# Altium PCB DMM6500 Scan card.PcbDoc (part 2 of 2)
Units mm, origin at the board's own origin, x right, y up, seen from the top; angles counter-clockwise.
Board outline 228.6 x 72.14 mm, 2 copper layers (Top Layer, Bottom Layer); 208 components, 132 nets, 652 pads, 172 vias.
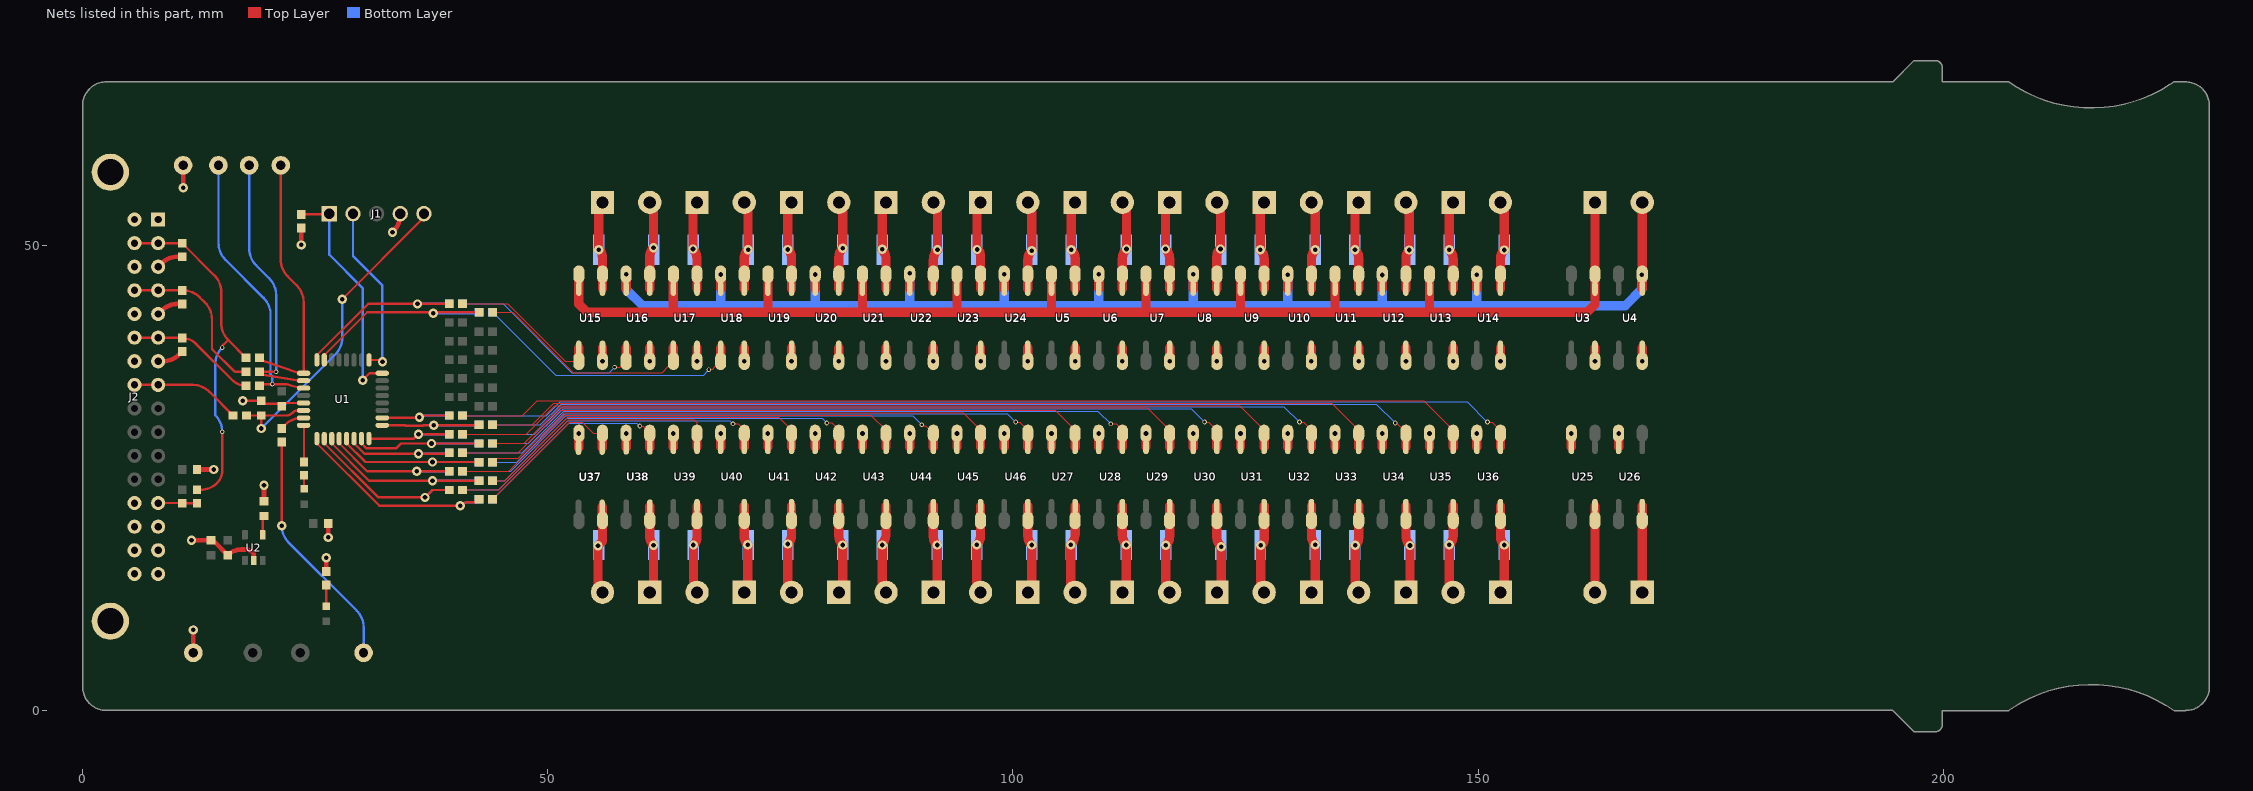
[diagram p2: the nets of this part, all layers, seen from the top]

## Via types
v1: diameter 1, hole 0.5, Top Layer to Bottom Layer, tented both sides, 146 vias
v2: diameter 0.5, hole 0.3, Top Layer to Bottom Layer, tented both sides, 26 vias

## Nets (pads, with @x,y where several pads share a name; then routed paths per layer and width w, separated by ;. In a path a pad name is that pad's centre, name@x,y a point inside that pad or via, vN(x,y) a via of type N, cw(c..) or ccw(c..) an arc to the next point about the centre after c; other vN are vias at no path point) (continued)
CH9_N: R18.2 U18.1 | length 29.5
  Top Layer w0.127: v2(67.3,36.635) 67.36,36.695 67.74,36.695 68.025,36.98 68.084,36.98 68.58,37.475 U18.1@68.58,37.535
  Top Layer w1: U18.1@68.58,37.535 U18.1@68.58,38.989
  Bottom Layer w0.127: R18.2@44.05,42.8 44.075,42.8 50.829,36.046 66.746,36.046 67.3,36.6 v2(67.3,36.635)
CH9_P: R17.2 U17.1 | length 24.1
  Top Layer w0.127: R17.2@44.075,42.8 46.241,42.8 52.719,36.322 62.287,36.322 62.945,36.98 63.004,36.98 63.5,37.475 U17.1@63.5,37.535
  Top Layer w1: U17.1@63.5,37.535 U17.1@63.5,38.989
CH9_uC: R17.1 R18.1 U1.31 | length 24.1
  Top Layer w0.254: U1.31@25.975,37.675 25.975,38.176 30.599,42.8 37.6,42.8 v1(37.7,42.7) 37.8,42.8 R17.1@42.625,42.8
  Bottom Layer w0.254: v1(37.7,42.7) 42.5,42.7 R18.1@42.6,42.8
CH10_N: R20.2 U16.1 | length 22.6
  Top Layer w0.127: v2(57.185,36.889) 57.774,36.889 57.865,36.98 57.924,36.98 58.42,37.475 U16.1@58.42,37.535
  Top Layer w1: U16.1@58.42,37.535 U16.1@58.42,38.989
  Bottom Layer w0.127: R20.2@40.85,43.7 45.2,43.7 52.6,36.3 56.596,36.3 v2(57.185,36.889)
CH10_P: R19.2 U15.1 | length 16.5
  Top Layer w0.127: R19.2@40.85,43.7 45.7,43.7 51.865,37.535 U15.1@53.34,37.535
  Top Layer w1: U15.1@53.34,37.535 U15.1@53.34,38.989
CH10_uC: R19.1 R20.1 U1.32 | length 19.9
  Top Layer w0.254: U1.32@25.175,38.176 30.699,43.7 v1(36,43.7) R19.1@39.4,43.7
  Bottom Layer w0.254: v1(36,43.7) R20.1@39.4,43.7
CH11_N: R22.2 U36.1 | length 115.2
  Top Layer w0.127: v2(151,31) 151.525,31 152.4,30.125 U36.1@152.4,29.775
  Top Layer w1: U36.1@152.4,28.321 U36.1@152.4,29.775
  Bottom Layer w0.127: R22.2@40.85,31.7 49.842,31.7 51.32,33.178 148.822,33.178 v2(151,31)
CH11_P: R21.2 U35.1 | length 110.2
  Top Layer w0.127: R21.2@40.85,31.7 47.279,31.7 48.853,33.275 54.645,33.275 144.171,33.274 147.32,30.125 U35.1@147.32,29.775
  Top Layer w1: U35.1@147.32,28.321 U35.1@147.32,29.775
CH11_uC: R21.1 R22.1 U1.18 | length 10
  Top Layer w0.254: U1.18@32.2,31.45 32.227,31.477 36.173,31.477 v1(36.2,31.504) ; 36.702,31.7 R21.1@39.4,31.7
  Bottom Layer w0.254: v1(36.2,31.504) 36.343,31.647 36.649,31.647 36.702,31.7 R22.1@39.4,31.7
CH12_N: R24.2 U34.1 | length 101.9
  Top Layer w0.127: v2(141.1,30.9) 141.201,30.9 142.24,29.861 U34.1@142.24,29.775
  Top Layer w1: U34.1@142.24,28.321 U34.1@142.24,29.775
  Bottom Layer w0.127: R24.2@44.05,30.7 49.201,30.7 51.425,32.924 139.076,32.924 v2(141.1,30.9)
CH12_P: R23.2 U33.1 | length 97.1
  Top Layer w0.127: R23.2@44.05,30.7 48.34,30.7 50.661,33.021 54.539,33.021 134.265,33.02 137.16,30.125 U33.1@137.16,29.775
  Top Layer w1: U33.1@137.16,28.321 U33.1@137.16,29.775
CH12_uC: R23.1 R24.1 U1.17 | length 15.3
  Top Layer w0.254: U1.17@32.2,30.65 34.676,30.65 34.703,30.623 36.593,30.623 36.62,30.65 v1(37.75,30.65) 42.55,30.65 R23.1@42.6,30.7
  Bottom Layer w0.254: v1(37.75,30.65) 42.55,30.65 R24.1@42.6,30.7
CH13_N: R26.2 U32.1 | length 95.3
  Top Layer w0.127: v2(130.8,31) 130.835,30.965 131.24,30.965 132.08,30.125 U32.1@132.08,29.775
  Top Layer w1: U32.1@132.08,28.321 U32.1@132.08,29.775
  Bottom Layer w0.127: R26.2@40.85,29.7 48.561,29.7 51.531,32.67 129.13,32.67 v2(130.8,31)
CH13_P: R25.2 U31.1 | length 90.3
  Top Layer w0.127: R25.2@40.85,29.7 47.699,29.7 50.766,32.767 54.434,32.767 124.359,32.766 127,30.125 U31.1@127,29.775
  Top Layer w1: U31.1@127,28.321 U31.1@127,29.775
CH13_uC: R25.1 R26.1 U1.16 | length 12.1
  Top Layer w0.254: U1.16@30.775,29.225 35.625,29.225 v1(36.1,29.7) R25.1@39.4,29.7
  Bottom Layer w0.254: v1(36.1,29.7) R26.1@39.4,29.7
CH14_N: R28.2 U30.1 | length 82.2
  Top Layer w0.127: v2(120.6,31) 121.045,31 121.92,30.125 U30.1@121.92,29.775
  Top Layer w1: U30.1@121.92,28.321 U30.1@121.92,29.775
  Bottom Layer w0.127: R28.2@44.05,28.7 47.92,28.7 51.636,32.416 119.184,32.416 v2(120.6,31)
CH14_P: R27.2 U29.1 | length 77.2
  Top Layer w0.127: R27.2@44.05,28.7 47.489,28.7 51.301,32.513 54.329,32.513 114.453,32.512 116.84,30.125 U29.1@116.84,29.775
  Top Layer w1: U29.1@116.84,28.321 U29.1@116.84,29.775
CH14_uC: R27.1 R28.1 U1.15 | length 18.7
  Top Layer w0.254: U1.15@29.975,29.225 29.975,28.724 30.526,28.173 33.699,28.173 34.226,28.7 v1(37.5,28.7) R27.1@42.6,28.7
  Bottom Layer w0.254: v1(37.5,28.7) R28.1@42.6,28.7
CH15_N: R30.2 U28.1 | length 75.4
  Top Layer w0.127: v2(110.5,30.8) 111.085,30.8 111.76,30.125 U28.1@111.76,29.775
  Top Layer w1: U28.1@111.76,28.321 U28.1@111.76,29.775
  Bottom Layer w0.127: R30.2@40.85,27.7 47.279,27.7 51.741,32.162 109.138,32.162 v2(110.5,30.8)
CH15_P: R29.2 U27.1 | length 70.4
  Top Layer w0.127: R29.2@40.85,27.7 46.848,27.7 51.407,32.259 54.224,32.259 104.547,32.258 106.68,30.125 U27.1@106.68,29.775
  Top Layer w1: U27.1@106.68,28.321 U27.1@106.68,29.775
CH15_uC: R29.1 R30.1 U1.14 | length 14.6
  Top Layer w0.254: U1.14@29.175,29.225 29.175,28.724 30.299,27.6 v1(36.1,27.6) 39.3,27.6 R29.1@39.4,27.7
  Bottom Layer w0.254: v1(36.1,27.6) 39.3,27.6 R30.1@39.4,27.7
CH16_N: R32.2 U46.1 | length 62.2
  Top Layer w0.127: v2(100.3,31) 100.315,30.985 100.74,30.985 101.6,30.125 U46.1@101.6,29.775
  Top Layer w1: U46.1@101.6,28.321 U46.1@101.6,29.775
  Bottom Layer w0.127: R32.2@44.05,26.7 46.638,26.7 51.846,31.908 99.392,31.908 v2(100.3,31)
CH16_P: R31.2 U45.1 | length 57.2
  Top Layer w0.127: R31.2@44.05,26.7 44.437,27.087 46.831,27.087 51.749,32.005 54.119,32.005 94.641,32.004 96.52,30.125 U45.1@96.52,29.775
  Top Layer w1: U45.1@96.52,28.321 U45.1@96.52,29.775
CH16_uC: R31.1 R32.1 U1.13 | length 20.6
  Top Layer w0.254: U1.13@28.375,29.225 28.375,28.724 30.399,26.7 v1(37.6,26.7) R31.1@42.6,26.7
  Bottom Layer w0.254: v1(37.6,26.7) R32.1@42.6,26.7
CH17_N: R34.2 U44.1 | length 55.3
  Top Layer w0.127: v2(90.2,30.7) 90.271,30.629 90.586,30.629 90.885,30.33 90.944,30.33 91.44,29.835 U44.1@91.44,29.775
  Top Layer w1: U44.1@91.44,28.321 U44.1@91.44,29.775
  Bottom Layer w0.127: R34.2@40.85,25.7 45.997,25.7 51.951,31.654 89.246,31.654 v2(90.2,30.7)
CH17_P: R33.2 U43.1 | length 50.5
  Top Layer w0.127: R33.2@40.85,25.7 45.804,25.7 51.854,31.751 54.013,31.751 84.735,31.75 86.36,30.125 U43.1@86.36,29.775
  Top Layer w1: U43.1@86.36,28.321 U43.1@86.36,29.775
CH17_uC: R33.1 R34.1 U1.12 | length 17.1
  Top Layer w0.254: U1.12@27.575,29.225 27.575,28.724 30.599,25.7 v1(35.9,25.7) R33.1@39.4,25.7
  Bottom Layer w0.254: v1(35.9,25.7) R34.1@39.4,25.7
CH18_N: R37.2 U42.1 | length 42.3
  Top Layer w0.127: v2(80,30.9) 80.505,30.9 81.28,30.125 U42.1@81.28,29.775
  Top Layer w1: U42.1@81.28,28.321 U42.1@81.28,29.775
  Bottom Layer w0.127: R37.2@44.05,24.7 45.357,24.7 52.057,31.4 79.5,31.4 v2(80,30.9)
CH18_P: R36.2 U41.1 | length 37.3
  Top Layer w0.127: R36.2@44.05,24.7 45.357,24.7 52.153,31.497 53.908,31.497 74.829,31.496 76.2,30.125 U41.1@76.2,29.775
  Top Layer w1: U41.1@76.2,28.321 U41.1@76.2,29.775
CH18_uC: R36.1 R37.1 U1.11 | length 23
  Top Layer w0.254: U1.11@26.775,29.225 26.775,28.724 30.799,24.7 v1(37.6,24.7) R36.1@42.6,24.7
  Bottom Layer w0.254: v1(37.6,24.7) R37.1@42.6,24.7
CH19_N: R39.2 U40.1 | length 35.6
  Top Layer w0.127: v2(69.9,30.8) 70.445,30.8 71.12,30.125 U40.1@71.12,29.775
  Top Layer w1: U40.1@71.12,28.321 U40.1@71.12,29.775
  Bottom Layer w0.127: R39.2@40.85,23.7 44.716,23.7 52.162,31.146 69.554,31.146 v2(69.9,30.8)
CH19_P: R38.2 U39.1 | length 31
  Top Layer w0.127: R38.2@40.85,23.7 44.716,23.7 52.258,31.243 53.803,31.243 65.713,31.242 66.04,30.915 U39.1@66.04,29.775
  Top Layer w1: U39.1@66.04,28.321 U39.1@66.04,29.775
CH19_uC: R38.1 R39.1 U1.10 | length 19.6
  Top Layer w0.254: U1.10@25.975,29.225 25.975,28.724 31.799,22.9 v1(36.8,22.9) 37.6,23.7 R38.1@39.4,23.7
  Bottom Layer w0.254: v1(36.8,22.9) 37.6,23.7 R39.1@39.4,23.7
CH20_N: R41.2 U38.1 | length 22.3
  Top Layer w0.127: v2(59.9,30.579) 59.95,30.529 60.266,30.529 60.96,29.835 U38.1@60.96,29.775
  Top Layer w1: U38.1@60.96,29.775 60.965,29.77 60.965,28.28 U38.1@60.97,28.275
  Bottom Layer w0.127: R41.2@44.05,22.7 44.075,22.7 52.267,30.892 59.587,30.892 v2(59.9,30.579)
CH20_P: R40.2 U37.1 | length 17.3
  Top Layer w0.127: R40.2@44.05,22.7 44.075,22.7 52.363,30.989 53.698,30.989 54.911,29.775 U37.1@55.88,29.775
  Top Layer w1: U37.1@55.84,28.25 55.86,28.27 55.86,29.755 U37.1@55.88,29.775
CH20_uC: R40.1 R41.1 U1.9 | length 22.8
  Top Layer w0.254: U1.9@25.175,28.724 31.899,22 v1(40.6,22) 40.802,22 41.179,22.377 42.277,22.377 R40.1@42.6,22.7
  Bottom Layer w0.254: v1(40.6,22) 40.802,22 41.179,22.377 42.277,22.377 R41.1@42.6,22.7
Clock: J2.A4 J2.B4 R49.1 R54.2 | length 17.9
  Top Layer w0.254: J2.B4@5.575,45.155 J2.A4@8.115,45.155 10.695,45.155 R54.2@10.7,45.15 10.798,45.15 cw(c10.798,42.61) 12.594,44.406 13.156,43.844 cw(c11.36,42.048) 13.9,42.048 13.9,38.952 ccw(c14.154,38.952) 13.974,38.772 16.272,36.474 ccw(c16.452,36.654) 16.452,36.4 R49.1@17.575,36.4
Clock_uC: R49.2 TP3.1 U1.2 | length 29.9
  Top Layer w0.254: v2(20.8,36.4) R49.2@19.025,36.4 19.373,36.077 23.3,35.45 U1.2@23.75,35.45
  Bottom Layer w0.254: TP3.1@17.9,58.6 17.9,49.652 ccw(c20.44,49.652) 18.644,47.856 20.056,46.444 cw(c18.26,44.648) 20.8,44.648 v2(20.8,36.4)
Data: J2.A2 J2.B2 R48.1 R52.2 R53.2 | length 38.6
  Top Layer w0.254: J2.B2@5.575,50.235 J2.A2@8.115,50.235 10.676,50.235 cw(c10.676,50.201) R53.2@10.7,50.225 14.156,46.769 cw(c12.36,44.973) 14.9,44.973 14.9,41.627 ccw(c17.44,41.627) 15.644,39.831 ; R52.2@12.3,23.725 12.673,23.725 ccw(c12.673,26.265) 14.469,24.469 ccw(c13.187,25.751) 15,25.751 v2(15,29.948) ; v2(15,39) cw(c15.452,39) 15.132,39.319 15.644,39.831 ; R48.1@17.575,37.9 15.644,39.831
  Bottom Layer w0.254: v2(15,29.948) ccw(c12.46,29.948) 14.256,31.744 14.256,37.204 cw(c16.796,37.204) v2(15,39)
Data_uC: R48.2 TP2.1 U1.1 | length 28.2
  Top Layer w0.254: R48.2@19.025,37.9 19.373,37.577 23.3,36.25 U1.1@23.75,36.25 23.75,43.898 ccw(c21.21,43.898) 23.006,45.694 22.044,46.656 cw(c23.84,48.452) 21.3,48.452 TP2.1@21.3,58.6
GND: C1.2 C2.1 C3.1 C4.1 C5.1 C6.1 C7.1 J1.4 J2.A1 J2.A3 J2.A5 J2.A7 J2.A14 J2.A15 J2.A16 J2.B1 J2.B3 J2.B5 J2.B7 J2.B13 J2.B14 J2.B15 J2.B16 J2.MP1 J2.MP2 R35.1 R53.1 R54.1 R55.1 R57.1 TP7.1 TP8.1 U1.5 U2.2 U3.2 U4.2 U5.2 U6.2 U7.2 U8.2 U9.2 U10.2 U11.2 U12.2 U13.2 U14.2 U15.2 U16.2 U17.2 U18.2 U19.2 U20.2 U21.2 U22.2 U23.2 U24.2 U25.2 U26.2 U27.2 U28.2 U29.2 U30.2 U31.2 U32.2 U33.2 U34.2 U35.2 U36.2 U37.2 U38.2 U39.2 U40.2 U41.2 U42.2 U43.2 U44.2 U45.2 U46.2 | length 104.1
  Top Layer w0.254: v1(17.2,33.3) C2.1@19.2,33.3 19.548,32.977 21.052,32.977 C1.2@21.4,32.7 21.748,33.023 23.3,33.05 U1.5@23.75,33.05
  Top Layer w0.5: J2.A7@8.115,37.535 8.608,37.535 ccw(c8.608,40.075) 10.404,38.279 R55.1@10.7,38.575 ; J2.A5@8.115,42.615 8.456,42.956 cw(c10.252,41.16) 10.252,43.7 R54.1@10.7,43.7 ; J2.A3@8.115,47.695 8.451,48.031 cw(c10.247,46.235) 10.247,48.775 R53.1@10.7,48.775 ; v1(10.8,56.2) TP7.1@10.8,58.6 ; v1(11.7,18.3) C3.1@13.8,18.3 cw(c13.8,17.817) 14.141,18.159 C5.1@15.6,16.7 cw(c17.049,15.251) 17.049,17.3 17.434,17.3 cw(c17.434,15.934) 18.4,16.9 U2.2@18.4,16.125 ; TP8.1@11.9,6.2 v1(11.9,8.659) ; C4.1@12.3,25.9 v1(14.1,25.9) ; C7.1@19.5,22.5 v1(19.5,24.2) ; v1(23.5,50.041) R35.1@23.5,51.875 ; R57.1@26.2,14.925 v1(26.2,16.4) ; v1(26.4,18.6) C6.1@26.4,20.1 ; v1(33.3,51.4) 33.396,51.496 ccw(c31.6,53.292) 34.14,53.292 J1.4@34.14,53.4
  Top Layer w1: U37.2@53.3,28.25 53.32,28.27 U37.2@53.32,29.755 ; v1(55.88,37.535) U15.2@55.88,38.989 ; U38.2@58.425,29.77 58.425,28.28 U38.2@58.43,28.275 ; v1(60.96,37.535) U16.2@60.96,38.989 ; U39.2@63.5,28.321 v1(63.5,29.775) ; v1(66.04,37.535) U17.2@66.04,38.989 ; U40.2@68.58,28.321 v1(68.58,29.775) ; v1(71.12,37.535) U18.2@71.12,38.989 ; U41.2@73.66,28.321 v1(73.66,29.775) ; v1(76.2,37.535) U19.2@76.2,38.989 ; U42.2@78.74,28.321 v1(78.74,29.775) ; v1(81.28,37.535) U20.2@81.28,38.989 ; U43.2@83.82,28.321 v1(83.82,29.775) ; v1(86.36,37.535) U21.2@86.36,38.989 ; U44.2@88.9,28.321 v1(88.9,29.775) ; v1(91.44,37.535) U22.2@91.44,38.989 ; U45.2@93.98,28.321 v1(93.98,29.775) ; v1(96.52,37.535) U23.2@96.52,38.989 ; U46.2@99.06,28.321 v1(99.06,29.775) ; v1(101.6,37.535) U24.2@101.6,38.989 ; U27.2@104.14,28.321 v1(104.14,29.775) ; v1(106.68,37.535) U5.2@106.68,38.989 ; U28.2@109.22,28.321 v1(109.22,29.775) ; v1(111.76,37.535) U6.2@111.76,38.989 ; U29.2@114.3,28.321 v1(114.3,29.775) ; v1(116.84,37.535) U7.2@116.84,38.989 ; U30.2@119.38,28.321 v1(119.38,29.775) ; v1(121.92,37.535) U8.2@121.92,38.989 ; U31.2@124.46,28.321 v1(124.46,29.775) ; v1(127,37.535) U9.2@127,38.989 ; U32.2@129.54,28.321 v1(129.54,29.775) ; v1(132.08,37.535) U10.2@132.08,38.989 ; U33.2@134.62,28.321 v1(134.62,29.775) ; v1(137.16,37.535) U11.2@137.16,38.989 ; U34.2@139.7,28.321 v1(139.7,29.775) ; v1(142.24,37.535) U12.2@142.24,38.989 ; U35.2@144.78,28.321 v1(144.78,29.775) ; v1(147.32,37.535) U13.2@147.32,38.989 ; U36.2@149.86,28.321 v1(149.86,29.775) ; v1(152.4,37.535) U14.2@152.4,38.989 ; U25.2@160.02,28.321 v1(160.02,29.775) ; v1(162.56,37.535) U3.2@162.56,38.989 ; U26.2@165.1,28.321 v1(165.1,29.775) ; v1(167.64,37.535) U4.2@167.64,38.989
  Bottom Layer w0.5: v1(11.9,8.659) cw(c12.241,8.659) v1@12,8.9 ; v1(23.5,50.041) ccw(c23.841,50.041) v1@23.6,49.8
  other v1: 53.34,29.775 58.42,29.775
ID: J2.A13 R52.1 R56.2 | length 4.2
  Top Layer w0.254: J2.A13@8.115,22.295 10.652,22.295 cw(c10.652,22.227) R56.2@10.7,22.275 R52.1@12.3,22.275
In_Hi: J3.1 U3.3 U5.4 U7.4 U9.4 U11.4 U13.4 U15.4 U17.4 U19.4 U21.4 U23.4 | length 160.9
  Top Layer w1: U15.4@53.34,46.885 53.34,43.688 54.217,42.811 63.5,42.811 ; U17.4@63.5,46.885 63.5,42.811 ; U19.4@73.66,46.885 73.66,42.851 73.7,42.811 ; U21.4@83.82,46.885 83.82,42.831 83.8,42.811 ; U23.4@93.98,46.885 93.98,42.831 94,42.811 ; U5.4@104.14,46.885 104.14,42.871 104.2,42.811 ; U7.4@114.3,46.885 114.3,42.911 114.2,42.811 ; U9.4@124.46,46.885 124.46,42.951 124.6,42.811 ; U11.4@134.62,46.885 134.62,42.891 134.7,42.811 ; U13.4@144.78,46.885 144.78,42.831 144.8,42.811 ; J3.1@162.56,54.61 162.56,43.671 161.7,42.811 144.8,42.811 ; 63.5,42.811 73.7,42.811 ; 73.7,42.811 83.8,42.811 ; 83.8,42.811 94,42.811 ; 94,42.811 104.2,42.811 ; 104.2,42.811 114.2,42.811 ; 114.2,42.811 124.6,42.811 ; 124.6,42.811 134.7,42.811 ; 134.7,42.811 144.8,42.811
In_Lo: J3.2 U4.3 U6.4 U8.4 U10.4 U12.4 U14.4 U16.4 U18.4 U20.4 U22.4 U24.4 | length 169.4
  Top Layer w1: U16.4@58.42,45.339 58.42,46.88 v1(58.415,46.885) U16.4@58.42,46.885 ; U18.4@68.58,45.339 68.58,46.845 v1(68.6,46.865) U18.4@68.58,46.885 ; U20.4@78.74,45.339 v1(78.74,46.86) U20.4@78.74,46.885 ; U22.4@88.9,45.339 U22.4@88.9,46.885 ; U24.4@99.06,45.339 v1(99.06,46.885) ; U6.4@109.22,45.339 v1(109.22,46.885) ; U8.4@119.38,45.339 v1(119.38,46.885) ; U10.4@129.54,45.339 v1(129.54,46.84) U10.4@129.54,46.885 ; U12.4@139.7,45.339 v1(139.7,46.8) U12.4@139.7,46.885 ; U14.4@149.86,45.339 v1(149.86,46.84) U14.4@149.86,46.885 ; U4.3@167.64,45.339 167.64,46.805 v1(167.6,46.845) U4.3@167.64,46.885 J3.2@167.64,54.61 ; U22.4@88.9,46.885 v1(88.9,47) U22.4@88.9,46.885
  Bottom Layer w1: v1(58.415,46.885) 58.415,45.285 60.2,43.5 68.6,43.5 ; v1(68.6,46.865) 68.6,43.5 ; v1(78.74,46.86) 78.74,43.56 78.8,43.5 ; v1(88.9,47) 88.9,43.5 ; v1(99.06,46.885) 99.06,43.54 99.1,43.5 ; v1(109.22,46.885) 109.22,43.58 109.3,43.5 ; v1(119.38,46.885) 119.38,43.52 119.4,43.5 ; v1(129.54,46.84) 129.54,43.54 129.5,43.5 ; v1(139.7,46.8) 139.7,43.6 139.8,43.5 ; v1(149.86,46.84) 149.86,43.54 149.9,43.5 ; v1(167.6,46.845) 167.6,45.3 165.8,43.5 149.9,43.5 ; 68.6,43.5 78.8,43.5 ; 78.8,43.5 88.9,43.5 ; 88.9,43.5 99.1,43.5 ; 99.1,43.5 109.3,43.5 ; 109.3,43.5 119.4,43.5 ; 119.4,43.5 129.5,43.5 ; 129.5,43.5 139.8,43.5 ; 139.8,43.5 149.9,43.5
LED: D1.1 R47.2 | length 1.5
  Top Layer w0.254: D1.1@23.8,23.825 R47.2@23.8,25.275
LED_uC: R47.1 U1.8 | length 3.9
  Top Layer w0.254: U1.8@23.75,30.65 cw(c23.629,30.529) 23.8,30.529 R47.1@23.8,26.725
NetC7_2: C7.2 U2.4 | length 2.1
  Top Layer w0.254: U2.4@19.35,18.875 19.35,20.538 cw(c19.862,20.538) C7.2@19.5,20.9
NetD2_1: D2.1 R57.2 | length 2.2
  Top Layer w0.254: D2.1@26.2,11.225 R57.2@26.2,13.475
NetJ4_1: J4.1 R58.1 U5.3 | length 9.5
  Top Layer w1: U5.3@106.68,45.339 U5.3@106.68,46.885 106.68,48.583 ccw(c105.383,48.583) 106.3,49.5 v1(106.27,49.53) 106.27,53.62 cw(c107.67,53.62) J4.1@106.68,54.61
NetJ4_2: J4.2 R58.2 U6.3 | length 9.5
  Top Layer w1: U6.3@111.76,45.339 U6.3@111.76,46.885 111.76,48.538 cw(c113.262,48.538) v1(112.2,49.6) 112.2,53.548 ccw(c110.698,53.548) J4.2@111.76,54.61
NetJ5_1: J5.1 R59.1 U7.3 | length 9.5
  Top Layer w1: U7.3@116.84,45.339 U7.3@116.84,46.885 116.84,48.538 ccw(c115.338,48.538) v1(116.402,49.598) 116.402,53.552 cw(c117.898,53.552) J5.1@116.84,54.61
NetJ5_2: J5.2 R59.2 U8.3 | length 9.6
  Top Layer w1: U8.3@121.92,45.339 U8.3@121.92,46.885 121.92,48.783 cw(c123.217,48.783) v1@122.3,49.7 ; J5.2@121.92,54.61 cw(c121.003,53.693) 122.3,53.693 v1@122.3,49.7 ; v1(122.3,49.602) v1@122.3,49.7
NetJ6_1: J6.1 R60.1 U9.3 | length 9.5
  Top Layer w1: U9.3@127,45.339 U9.3@127,46.885 127,48.534 ccw(c125.634,48.534) 126.6,49.5 cw(c126.624,49.524) v1(126.59,49.524) 126.59,53.62 cw(c127.99,53.62) J6.1@127,54.61
NetJ6_2: J6.2 R60.2 U10.3 | length 9.5
  Top Layer w1: U10.3@132.08,45.339 U10.3@132.08,46.885 132.08,48.486 cw(c133.514,48.486) 132.5,49.5 v1(132.5,49.506) 132.5,53.596 ccw(c131.066,53.596) J6.2@132.08,54.61
NetJ7_1: J7.1 R61.1 U11.3 | length 9.5
  Top Layer w1: U11.3@137.16,45.339 U11.3@137.16,46.885 137.16,48.631 ccw(c135.931,48.631) 136.8,49.5 cw(c136.8,49.548) v1(136.766,49.514) 136.766,53.659 cw(c138.111,53.659) J7.1@137.16,54.61
NetJ7_2: J7.2 R61.2 U12.3 | length 9.5
  Top Layer w1: U12.3@142.24,45.339 U12.3@142.24,46.885 142.24,48.631 cw(c143.469,48.631) v1(142.6,49.5) 142.6,53.741 ccw(c141.371,53.741) J7.2@142.24,54.61
NetJ8_1: J8.1 R62.1 U13.3 | length 9.5
  Top Layer w1: U13.3@147.32,45.339 U13.3@147.32,46.885 147.32,48.486 ccw(c145.886,48.486) 146.9,49.5 v1(146.9,49.506) 146.9,53.596 cw(c148.334,53.596) J8.1@147.32,54.61
NetJ8_2: J8.2 R62.2 U14.3 | length 9.5
  Top Layer w1: U14.3@152.4,45.339 U14.3@152.4,46.885 152.4,48.534 cw(c153.766,48.534) v1(152.8,49.5) 152.8,53.644 ccw(c151.434,53.644) J8.2@152.4,54.61
NetJ9_1: J9.1 R63.1 U15.3 | length 9.6
  Top Layer w1: U15.3@55.88,45.339 U15.3@55.88,46.885 55.88,48.683 ccw(c54.583,48.683) 55.5,49.6 cw(c55.403,49.6) v1(55.472,49.532) 55.472,53.624 cw(c56.866,53.624) J9.1@55.88,54.61
NetJ9_2: J9.2 R63.2 U16.3 | length 9.5
  Top Layer w1: U16.3@60.96,45.339 U16.3@60.96,46.885 60.96,48.738 cw(c62.462,48.738) v1@61.37,49.769 ; J9.2@60.96,54.61 cw(c59.97,53.62) 61.37,53.62 v1@61.37,49.769 ; v1(61.37,49.728) v1@61.37,49.769
NetJ10_1: J10.1 R64.1 U17.3 | length 9.5
  Top Layer w1: U17.3@66.04,45.339 U17.3@66.04,46.885 66.04,48.538 ccw(c64.538,48.538) v1(65.602,49.598) 65.602,53.552 cw(c67.098,53.552) J10.1@66.04,54.61
NetJ10_2: J10.2 R64.2 U18.3 | length 9.6
  Top Layer w1: U18.3@71.12,45.339 U18.3@71.12,46.885 71.12,48.541 cw(c72.759,48.541) v1@71.53,49.625 ; J10.2@71.12,54.61 cw(c70.13,53.62) 71.53,53.62 v1@71.53,49.625 ; v1(71.53,49.531) v1@71.53,49.625
NetJ11_1: J11.1 R65.1 U19.3 | length 9.5
  Top Layer w1: v1(75.8,49.554) v1@75.8,49.6 ; U19.3@76.2,45.339 U19.3@76.2,46.885 76.2,48.634 ccw(c74.834,48.634) v1@75.8,49.6 ; J11.1@76.2,54.61 ccw(c77.166,53.644) 75.8,53.644 v1@75.8,49.6
NetJ11_2: J11.2 R65.2 U20.3 | length 9.5
  Top Layer w1: U20.3@81.28,45.339 U20.3@81.28,46.885 81.28,48.686 cw(c82.714,48.686) v1@81.69,49.69 ; J11.2@81.28,54.61 cw(c80.29,53.62) 81.69,53.62 v1@81.69,49.69 ; v1(81.69,49.676) v1@81.69,49.69
NetJ12_1: J12.1 R66.1 U21.3 | length 9.6
  Top Layer w1: U21.3@86.36,45.339 U21.3@86.36,46.885 86.36,48.489 ccw(c84.789,48.489) v1@85.902,49.598 ; J12.1@86.36,54.61 ccw(c87.384,53.586) 85.936,53.586 v1(85.936,49.564) v1@85.902,49.598 ; v1@85.902,49.598 ccw(c84.789,48.489) 85.9,49.6 v1@85.902,49.598
NetJ12_2: J12.2 R66.2 U22.3 | length 9.5
  Top Layer w1: U22.3@91.44,45.339 U22.3@91.44,46.885 91.44,48.39 cw(c93.01,48.39) 91.9,49.5 v1(91.884,49.516) 91.884,53.538 ccw(c90.368,53.538) J12.2@91.44,54.61
NetJ13_1: J13.1 R67.1 U23.3 | length 9.6
  Top Layer w1: U23.3@96.52,45.339 U23.3@96.52,46.885 96.52,48.827 ccw(c95.427,48.827) 96.2,49.6 v1(96.144,49.544) 96.144,53.703 cw(c97.427,53.703) J13.1@96.52,54.61
NetJ13_2: J13.2 R67.2 U24.3 | length 9.5
  Top Layer w1: U24.3@101.6,45.339 U24.3@101.6,46.885 101.6,48.434 cw(c102.966,48.434) 102,49.4 ccw(c101.976,49.424) v1(102.01,49.424) 102.01,53.62 ccw(c100.61,53.62) J13.2@101.6,54.61
NetJ15_1: J15.1 R68.2 U28.4 | length 9.5
  Top Layer w1: J15.1@111.76,12.7 ccw(c110.746,13.714) 112.18,13.714 v1(112.18,17.78) 112.2,17.8 cw(c113.262,18.862) 111.76,18.862 U28.4@111.76,20.425 U28.4@111.76,21.971
NetJ15_2: J15.2 R68.1 U27.4 | length 9.5
  Top Layer w1: J15.2@106.68,12.7 cw(c107.839,13.859) 106.2,13.859 v1(106.2,17.8) ccw(c105.041,18.959) 106.68,18.959 U27.4@106.68,20.425 U27.4@106.68,21.971
NetJ16_1: J16.1 R69.2 U30.4 | length 9.5
  Top Layer w1: J16.1@121.92,12.7 ccw(c120.761,13.859) 122.4,13.859 v1(122.4,17.6) 122.3,17.7 cw(c123.217,18.617) 121.92,18.617 U30.4@121.92,20.425 U30.4@121.92,21.971
NetJ16_2: J16.2 R69.1 U29.4 | length 9.5
  Top Layer w1: v1(116.43,17.772) v1@116.43,17.731 ; J16.2@116.84,12.7 cw(c117.83,13.69) 116.43,13.69 v1@116.43,17.731 ; U29.4@116.84,21.971 U29.4@116.84,20.425 116.84,18.762 cw(c115.338,18.762) v1@116.43,17.731
NetJ17_1: J17.1 R70.2 U32.4 | length 9.5
  Top Layer w1: J17.1@132.08,12.7 ccw(c131.066,13.714) 132.5,13.714 v1(132.5,17.8) cw(c133.514,18.814) 132.08,18.814 U32.4@132.08,20.425 U32.4@132.08,21.971
NetJ17_2: J17.2 R70.1 U31.4 | length 9.6
  Top Layer w1: J17.2@127,12.7 cw(c127.866,13.566) 126.641,13.566 v1(126.641,17.759) 126.7,17.7 ccw(c125.976,18.424) 127,18.424 U31.4@127,20.425 U31.4@127,21.971
NetJ18_1: J18.1 R71.2 U34.4 | length 9.6
  Top Layer w1: J18.1@142.24,12.7 ccw(c141.199,13.741) 142.671,13.741 v1(142.671,17.729) 142.7,17.7 cw(c143.81,18.81) 142.24,18.81 U34.4@142.24,20.425 U34.4@142.24,21.971
NetJ18_2: J18.2 R71.1 U33.4 | length 9.6
  Top Layer w1: J18.2@137.16,12.7 cw(c138.08,13.62) 136.779,13.62 v1(136.779,17.751) cw(c136.727,17.7) 136.8,17.7 ccw(c135.931,18.569) 137.16,18.569 U33.4@137.16,20.425 U33.4@137.16,21.971
NetJ19_1: J19.1 R72.2 U36.4 | length 9.5
  Top Layer w1: J19.1@152.4,12.7 ccw(c151.41,13.69) 152.81,13.69 v1(152.81,17.79) 152.8,17.8 cw(c153.766,18.766) 152.4,18.766 U36.4@152.4,20.425 U36.4@152.4,21.971
NetJ19_2: J19.2 R72.1 U35.4 | length 9.5
  Top Layer w1: J19.2@147.32,12.7 cw(c148.334,13.714) 146.9,13.714 v1(146.9,17.8) ccw(c145.886,18.814) 147.32,18.814 U35.4@147.32,20.425 U35.4@147.32,21.971
NetJ20_1: J20.1 R73.2 U38.4 | length 9.5
  Top Layer w1: J20.1@60.96,12.7 ccw(c59.97,13.69) 61.37,13.69 v1@61.37,17.731 ; U38.4@60.97,21.925 60.965,21.92 60.965,20.43 U38.4@60.96,20.425 60.96,18.762 ccw(c62.462,18.762) v1@61.37,17.731 ; v1(61.37,17.772) v1@61.37,17.731
NetJ20_2: J20.2 R73.1 U37.4 | length 9.5
  Top Layer w1: U37.4@55.84,21.9 55.86,21.88 55.86,20.445 U37.4@55.88,20.425 55.88,18.18 v1(55.4,17.7) 55.4,13.859 ccw(c57.039,13.859) J20.2@55.88,12.7
NetJ21_1: J21.1 R74.2 U40.4 | length 9.5
  Top Layer w1: J21.1@71.12,12.7 ccw(c70.203,13.617) 71.5,13.617 v1(71.5,17.8) cw(c72.417,18.717) 71.12,18.717 U40.4@71.12,20.425 U40.4@71.12,21.971
NetJ21_2: J21.2 R74.1 U39.4 | length 9.5
  Top Layer w1: J21.2@66.04,12.7 cw(c66.977,13.637) 65.652,13.637 v1(65.652,17.78) ccw(c65.652,17.848) 65.7,17.8 ccw(c64.879,18.621) 66.04,18.621 U39.4@66.04,20.425 U39.4@66.04,21.971
NetJ22_1: J22.1 R75.2 U42.4 | length 9.5
  Top Layer w1: J22.1@81.28,12.7 ccw(c80.266,13.714) 81.7,13.714 v1(81.7,17.79) 81.7,17.8 cw(c82.714,18.814) 81.28,18.814 U42.4@81.28,20.425 U42.4@81.28,21.971
NetJ22_2: J22.2 R75.1 U41.4 | length 9.5
  Top Layer w1: J22.2@76.2,12.7 cw(c77.166,13.666) 75.8,13.666 v1(75.8,17.9) ccw(c74.834,18.866) 76.2,18.866 U41.4@76.2,20.425 U41.4@76.2,21.971
NetJ23_1: J23.1 R76.2 U44.4 | length 9.5
  Top Layer w1: J23.1@91.44,12.7 ccw(c90.455,13.685) 91.848,13.685 v1(91.848,17.78) cw(c91.848,17.848) 91.8,17.8 cw(c92.669,18.669) 91.44,18.669 U44.4@91.44,20.425 U44.4@91.44,21.971
NetJ23_2: J23.2 R76.1 U43.4 | length 9.5
  Top Layer w1: J23.2@86.36,12.7 cw(c87.351,13.691) 85.949,13.691 v1(85.949,17.781) cw(c86.069,17.9) 85.9,17.9 ccw(c84.789,19.011) 86.36,19.011 U43.4@86.36,20.425 U43.4@86.36,21.971
NetJ24_1: J24.1 R77.2 U46.4 | length 9.5
  Top Layer w1: J24.1@101.6,12.7 ccw(c100.61,13.69) 102.01,13.69 v1(102.01,17.79) 102,17.8 cw(c102.966,18.766) 101.6,18.766 U46.4@101.6,20.425 U46.4@101.6,21.971
NetJ24_2: J24.2 R77.1 U45.4 | length 9.5
  Top Layer w1: J24.2@96.52,12.7 cw(c97.534,13.714) 96.1,13.714 v1(96.1,17.8) ccw(c95.086,18.814) 96.52,18.814 U45.4@96.52,20.425 U45.4@96.52,21.971
Prog_SWCLK: J1.2 U1.25 | length 18.8
  Top Layer w0.254: U1.25@30.775,37.675 32.076,37.675 32.225,37.526 v1(32.225,37.475)
  Bottom Layer w0.254: J1.2@29.06,53.4 29.06,48.84 32.225,45.675 v1(32.225,37.475)
Prog_SWDIO: J1.1 R35.2 U1.24 | length 24.8
  Top Layer w0.254: R35.2@23.5,53.325 26.339,53.325 ccw(c26.339,53.581) J1.1@26.52,53.4 ; v1(30.1,35.5) 30.85,36.25 U1.24@32.2,36.25
  Bottom Layer w0.254: J1.1@26.52,53.4 26.52,48.98 30.1,45.4 v1(30.1,35.5)
Reset: J2.A8 J2.B8 R51.1 | length 11.9
  Top Layer w0.254: J2.B8@5.575,34.995 J2.A8@8.115,34.995 11.828,34.995 cw(c11.828,32.455) 13.624,34.251 R51.1@16.175,31.7
Reset_uC: C2.2 J1.5 R51.2 U1.6 | length 37.9
  Top Layer w0.254: R51.2@17.625,31.7 C2.2@19.2,31.7 ; v1(19.2,30.3) C2.2@19.2,31.7 ; U1.6@23.75,32.25 23.062,32.25 ccw(c23.062,31.738) 22.7,32.1 cw(c21.734,33.066) 21.734,31.7 C2.2@19.2,31.7 ; v1(27.9,44.2) 36.383,52.683 ccw(c35.666,53.4) J1.5@36.68,53.4
  Bottom Layer w0.254: v1(19.2,30.3) 27.156,38.256 ccw(c25.36,40.052) 27.9,40.052 v1(27.9,44.2)
Sense_Hi: J14.2 U25.4 | length 9.3
  Top Layer w1: J14.2@162.56,12.7 U25.4@162.56,20.425 U25.4@162.56,21.971
Sense_Lo: J14.1 U26.4 | length 9.3
  Top Layer w1: J14.1@167.64,12.7 U26.4@167.64,20.425 U26.4@167.64,21.971
Strobe: J2.A6 J2.B6 R50.1 R55.2 | length 13.9
  Top Layer w0.254: J2.B6@5.575,40.075 J2.A6@8.115,40.075 10.377,40.075 R55.2@10.7,40.025 cw(c10.7,37.913) 12.194,39.406 16.081,35.519 ccw(c17.575,37.012) R50.1@17.575,34.9
Strobe_uC: R50.2 TP4.1 U1.3 | length 30.5
  Top Layer w0.254: R50.2@19.025,34.9 19.373,35.077 v2(20.4,35.077) 20.924,35.077 ; 20.925,35.077 21.875,35.077 cw(c21.875,34.75) 21.972,35.062 23.3,34.65 U1.3@23.75,34.65
  Bottom Layer w0.254: TP4.1@14.6,58.6 14.6,50.252 ccw(c17.14,50.252) 15.344,48.456 19.456,44.344 cw(c17.66,42.548) 20.2,42.548 20.2,36.633 cw(c19.946,36.632) 20.191,36.566 ccw(c20.8,36.4) 20.334,35.975 cw(c20.146,35.804) 20.4,35.806 cw(c18.693,35.793) 20.4,35.793 v2(20.4,35.077)
Tx: R46.2 TP1.1 | length 26.1
  Top Layer w0.254: v1(21.4,19.852) R46.2@21.4,28.875
  Bottom Layer w0.254: v1(21.4,19.852) ccw(c23.94,19.852) 22.144,18.056 29.456,10.744 cw(c27.66,8.948) 30.2,8.948 TP1.1@30.2,6.2
Tx_uC: R46.1 U1.7 | length 2.7
  Top Layer w0.254: R46.1@21.4,30.325 21.781,30.706 cw(c23.577,28.91) 23.577,31.45 U1.7@23.75,31.45

## Polygon pours and split planes (outlines as drawn)
GND on Bottom Layer "GND_L02_P000" (solid, pour order 0): 2,3 2,65 47.752,65 47.752,44.852 53.086,39.878 168.402,39.878 168.39,27.444 53.086,27.686 47.752,22.352 47.752,3

## Keep-outs
Keep-Out Layer:
  circle w0.254: c44.45,54.61 r1.75
  circle w0.254: c44.45,12.7 r1.75
  circle w0.254: c182.245,12.065 r1.75
  circle w0.254: c194.945,12.065 r1.75
  circle w0.254: c194.945,55.245 r1.75
  circle w0.254: c182.245,55.245 r1.75
  lines w0.508: 194.564,0 196.85,-2.286 199.136,-2.286 199.189,-2.284 199.242,-2.279 199.294,-2.269 199.346,-2.256 199.397,-2.24 199.446,-2.22 199.494,-2.197 199.54,-2.17 199.584,-2.14 199.626,-2.108 199.665,-2.072 199.702,-2.034 199.736,-1.993 199.768,-1.95 199.796,-1.905 199.821,-1.858 199.843,-1.809 199.861,-1.759 199.875,-1.708 199.886,-1.656 199.894,-1.604 199.898,-1.551 199.898,-1.524 199.898,0 ; 194.574,0 2.54,0 2.451,0.002 2.274,0.014 2.099,0.039 1.925,0.075 1.755,0.124 1.588,0.185 1.427,0.257 1.27,0.34 1.12,0.434 0.976,0.538 0.84,0.652 0.713,0.776 0.594,0.907 0.485,1.047 0.386,1.194 0.297,1.348 0.22,1.507 0.153,1.671 0.098,1.84 0.055,2.012 0.025,2.187 0.006,2.363 0,2.54 0,65.024 0.002,65.113 0.014,65.29 0.039,65.465 0.075,65.639 0.124,65.809 0.185,65.976 0.257,66.137 0.34,66.294 0.434,66.444 0.538,66.588 0.652,66.724 0.776,66.851 0.907,66.97 1.047,67.079 1.194,67.178 1.348,67.267 1.507,67.344 1.671,67.411 1.84,67.466 2.012,67.509 2.187,67.539 2.363,67.558 2.54,67.564 194.564,67.564 196.85,69.85 199.136,69.85 199.163,69.85 199.216,69.846 199.268,69.838 199.32,69.827 199.371,69.813 199.421,69.795 199.47,69.773 199.517,69.748 199.562,69.72 199.605,69.688 199.646,69.654 199.684,69.617 199.72,69.578 199.752,69.536 199.782,69.492 199.809,69.446 199.832,69.398 199.852,69.349 199.868,69.298 199.881,69.246 199.891,69.194 199.896,69.141 199.898,69.088 199.898,67.564 207.01,67.564 207.921,66.975 208.87,66.451 209.854,65.994 210.868,65.607 211.906,65.292 212.963,65.05 214.035,64.882 215.115,64.79 216.2,64.773 217.283,64.832 218.359,64.966 219.424,65.175 220.471,65.457 221.496,65.812 222.494,66.238 223.459,66.732 224.388,67.293 224.79,67.564 226.06,67.564 226.149,67.562 226.326,67.55 226.501,67.525 226.675,67.489 226.845,67.44 227.012,67.379 227.173,67.307 227.33,67.224 227.48,67.13 227.624,67.026 227.76,66.912 227.887,66.788 228.006,66.657 228.115,66.517 228.214,66.37 228.303,66.216 228.38,66.057 228.447,65.893 228.502,65.724 228.545,65.552 228.575,65.377 228.594,65.201 228.6,65.024 228.6,2.54 228.598,2.451 228.586,2.274 228.561,2.099 228.525,1.925 228.476,1.755 228.415,1.588 228.343,1.427 228.26,1.27 228.166,1.12 228.062,0.976 227.948,0.84 227.824,0.713 227.693,0.594 227.553,0.485 227.406,0.386 227.252,0.297 227.093,0.22 226.929,0.153 226.76,0.098 226.588,0.055 226.413,0.025 226.237,0.006 226.06,0 ; 199.898,-0.009 207.02,-0.009 207.422,0.262 208.351,0.822 209.316,1.316 210.314,1.742 211.339,2.097 212.386,2.38 213.45,2.589 214.527,2.723 215.61,2.782 216.694,2.765 217.775,2.672 218.847,2.504 219.904,2.262 220.942,1.947 221.955,1.56 222.939,1.104 223.889,0.58 224.8,-0.009 226.07,-0.009
  lines w2: 176.022,63.5 205.743,63.504 206.84,62.833 207.982,62.24 209.162,61.728 210.375,61.3 211.614,60.957 212.875,60.702 214.151,60.535 215.435,60.458 216.721,60.47 218.003,60.572 219.275,60.764 220.531,61.043 221.764,61.41 222.968,61.861 224.138,62.396 224.79,62.738 224.79,53.848 ; 176.032,4.054 205.752,4.051 206.374,4.444 207.498,5.071 208.662,5.617 209.862,6.082 211.091,6.461 212.343,6.754 213.613,6.959 214.894,7.074 216.18,7.1 217.465,7.037 218.742,6.884 220.006,6.642 221.249,6.312 222.466,5.897 223.652,5.397 224.8,4.816 224.8,13.706

## Silkscreen, mask and mechanical layers (free items; w line width, h text height)
Top Overlay:
  drawing of 31 lines, arcs and shapes, not listed
  text "CH10" at 60.96,66.019 h2 r180
  text "CH9" at 70.485,66.019 h2 r180
  text "CH8" at 80.645,66.019 h2 r180
  text "CH7" at 90.805,66.019 h2 r180
  text "CH6" at 100.965,66.019 h2 r180
  text "CH5" at 111.125,66.019 h2 r180
  text "CH4" at 121.285,66.019 h2 r180
  text "CH3" at 131.445,66.017 h2 r180
  text "CH2" at 141.605,66.019 h2 r180
  text "CH1" at 151.765,66.019 h2 r180
  text "Measure" at 168.275,66.02 h2 r180
  text "L" at 56.515,63.5 h2 r180
  text "H" at 61.595,63.5 h2 r180
  text "L" at 66.675,63.5 h2 r180
  text "H" at 71.755,63.5 h2 r180
  text "L" at 76.835,63.5 h2 r180
  text "H" at 81.915,63.5 h2 r180
  text "L" at 86.995,63.5 h2 r180
  text "H" at 92.075,63.5 h2 r180
  text "L" at 97.155,63.5 h2 r180
  text "H" at 102.235,63.5 h2 r180
  text "L" at 107.315,63.5 h2 r180
  text "H" at 112.395,63.5 h2 r180
  text "L" at 117.475,63.5 h2 r180
  text "H" at 122.555,63.5 h2 r180
  text "L" at 127.635,63.5 h2 r180
  text "H" at 132.715,63.5 h2 r180
  text "L" at 137.795,63.5 h2 r180
  text "H" at 142.875,63.5 h2 r180
  text "L" at 147.955,63.5 h2 r180
  text "H" at 153.035,63.5 h2 r180
  text "L" at 163.195,63.5 h2 r180
  text "H" at 168.275,63.5 h2 r180
  text "." at 184.785,41.275 h8 r90
  text "." at 186.69,41.275 h8 r90
  text "." at 188.595,41.275 h8 r90
  text "CH2" at 191.749,40.005 h2 r90
  text "CH1" at 194.289,40.005 h2 r90
  text "CH10" at 182.224,39.37 h2 r90
  text "MEASURE" at 179.684,37.465 h2 r90
  text "." at 184.785,24.765 h8 r90
  text "." at 186.69,24.765 h8 r90
  text "." at 188.595,24.765 h8 r90
  text "CH20" at 182.224,22.86 h2 r90
  text "CH12" at 191.749,22.86 h2 r90
  text "CH11" at 194.289,22.86 h2 r90
  text "SENSE" at 179.684,22.225 h2 r90
  text "4W CHANNEL PAIRS" at 176.498,20.955 h3 r90
  text "Ref. SSR Data for V and I ratings" at 212.797,13.97 h3 r90
  text "2000-SCAN-20" at 220.271,13.329 h7 r90
  text "Check current shunts on bottom side" at 208.248,12.065 h3 r90
  text "H" at 55.245,3.81 h2
  text "L" at 60.325,3.81 h2
  text "H" at 65.405,3.81 h2
  text "L" at 70.485,3.81 h2
  text "H" at 75.565,3.81 h2
  text "L" at 80.645,3.81 h2
  text "H" at 85.725,3.81 h2
  text "L" at 90.805,3.81 h2
  text "H" at 95.885,3.81 h2
  text "L" at 100.965,3.81 h2
  text "H" at 106.045,3.81 h2
  text "L" at 111.125,3.81 h2
  text "H" at 116.205,3.81 h2
  text "L" at 121.285,3.81 h2
  text "H" at 126.365,3.81 h2
  text "L" at 131.445,3.81 h2
  text "H" at 136.525,3.81 h2
  text "L" at 141.605,3.81 h2
  text "H" at 146.685,3.81 h2
  text "L" at 151.765,3.81 h2
  text "H" at 161.925,3.81 h2
  text "L" at 167.005,3.81 h2
  text "CH20" at 55.88,1.291 h2
  text "CH19" at 66.04,1.291 h2
  text "CH18" at 76.2,1.291 h2
  text "CH17" at 86.36,1.291 h2
  text "CH16" at 96.52,1.291 h2
  text "CH15" at 106.68,1.291 h2
  text "CH14" at 116.84,1.291 h2
  text "CH13" at 127,1.293 h2
  text "CH12" at 137.16,1.291 h2
  text "CH11" at 147.32,1.291 h2
  text "Sense" at 162.56,1.291 h2
Bottom Overlay:
  lines w0.254: 52.07,15.24 52.07,23.495 154.94,23.495 154.94,15.24 52.07,15.24 ; 52.705,43.18 52.705,52.07 154.94,52.07 154.94,46.355 154.94,43.18 52.705,43.18
  lines w0.5: 158.115,16.51 155.575,17.78 ; 158.115,19.05 155.575,17.78 ; 158.115,48.26 155.575,49.53 ; 158.115,50.8 155.575,49.53 ; 174.625,17.78 155.575,17.78 ; 174.625,49.53 155.575,49.53
  text "Current shunts" at 193.675,48.927 h3
  text "2512 package" at 190.502,46.73 h2
  text "CH10" at 60.325,44.471 h2
  text "CH9" at 69.85,44.471 h2
  text "CH8" at 80.01,44.471 h2
  text "CH7" at 90.17,44.471 h2
  text "CH6" at 100.33,44.471 h2
  text "CH5" at 110.49,44.471 h2
  text "CH4" at 120.65,44.471 h2
  text "CH3" at 130.81,44.473 h2
  text "CH2" at 140.97,44.471 h2
  text "CH1" at 151.13,44.471 h2
  text "CH20" at 56.515,22.204 h2 r180
  text "CH19" at 66.675,22.204 h2 r180
  text "CH18" at 76.835,22.204 h2 r180
  text "CH17" at 86.995,22.204 h2 r180
  text "CH16" at 97.155,22.204 h2 r180
  text "CH15" at 107.315,22.204 h2 r180
  text "CH14" at 117.475,22.204 h2 r180
  text "CH13" at 127.635,22.202 h2 r180
  text "CH12" at 137.795,22.204 h2 r180
  text "CH11" at 147.955,22.204 h2 r180
  text "2512 package" at 190.502,20.06 h2
  text "Current shunts" at 193.675,17.177 h3

## Text inside footprints (layer, text, board x,y; h text height)
J1: Top Overlay "1" at 25.2,53.97 h2 r180
J2: Top Assembly "32" at 3.533,13.97 h2 r90; Top Assembly "17" at 3.556,52.324 h2 r90; Top Assembly "16" at 8.107,11.938 h2 r90; Top Assembly "1" at 8.382,53.848 h2 r90; Top Overlay "1" at 8.817,54.299 h2 r90; Assembly Notes "PCB edge" at 1.438,47.795 h0.5 r90
J3: Top Assembly "1" at 160.528,54.864 h2; Top Overlay "1" at 160.528,54.864 h2
J4: Top Assembly "1" at 104.648,54.864 h2; Top Overlay "1" at 104.648,54.864 h2
J5: Top Assembly "1" at 114.808,54.864 h2; Top Overlay "1" at 114.808,54.864 h2
J6: Top Assembly "1" at 124.968,54.864 h2; Top Overlay "1" at 124.968,54.864 h2
J7: Top Assembly "1" at 135.128,54.864 h2; Top Overlay "1" at 135.128,54.864 h2
J8: Top Assembly "1" at 145.288,54.864 h2; Top Overlay "1" at 145.288,54.864 h2
J9: Top Assembly "1" at 53.848,54.864 h2; Top Overlay "1" at 53.848,54.864 h2
J10: Top Assembly "1" at 64.008,54.864 h2; Top Overlay "1" at 64.008,54.864 h2
J11: Top Assembly "1" at 74.168,54.864 h2; Top Overlay "1" at 74.168,54.864 h2
J12: Top Assembly "1" at 84.328,54.864 h2; Top Overlay "1" at 84.328,54.864 h2
J13: Top Assembly "1" at 94.488,54.864 h2; Top Overlay "1" at 94.488,54.864 h2
J14: Top Assembly "1" at 169.672,12.446 h2 r180; Top Overlay "1" at 169.672,12.446 h2 r180
J15: Top Assembly "1" at 113.792,12.446 h2 r180; Top Overlay "1" at 113.792,12.446 h2 r180
J16: Top Assembly "1" at 123.952,12.446 h2 r180; Top Overlay "1" at 123.952,12.446 h2 r180
J17: Top Assembly "1" at 134.112,12.446 h2 r180; Top Overlay "1" at 134.112,12.446 h2 r180
J18: Top Assembly "1" at 144.272,12.446 h2 r180; Top Overlay "1" at 144.272,12.446 h2 r180
J19: Top Assembly "1" at 154.432,12.446 h2 r180; Top Overlay "1" at 154.432,12.446 h2 r180
J20: Top Assembly "1" at 62.992,12.446 h2 r180; Top Overlay "1" at 62.992,12.446 h2 r180
J21: Top Assembly "1" at 73.152,12.446 h2 r180; Top Overlay "1" at 73.152,12.446 h2 r180
J22: Top Assembly "1" at 83.312,12.446 h2 r180; Top Overlay "1" at 83.312,12.446 h2 r180
J23: Top Assembly "1" at 93.472,12.446 h2 r180; Top Overlay "1" at 93.472,12.446 h2 r180
J24: Top Assembly "1" at 103.632,12.446 h2 r180; Top Overlay "1" at 103.632,12.446 h2 r180